# Altium PCB PCB_CAMBIEN_VER2.PcbDoc
Units mm, origin at the board's own origin, x right, y up, seen from the top; angles counter-clockwise.
Board outline 71.25 x 52.25 mm, 2 copper layers (Top Layer, Bottom Layer); 54 components, 40 nets, 197 pads, 46 vias.
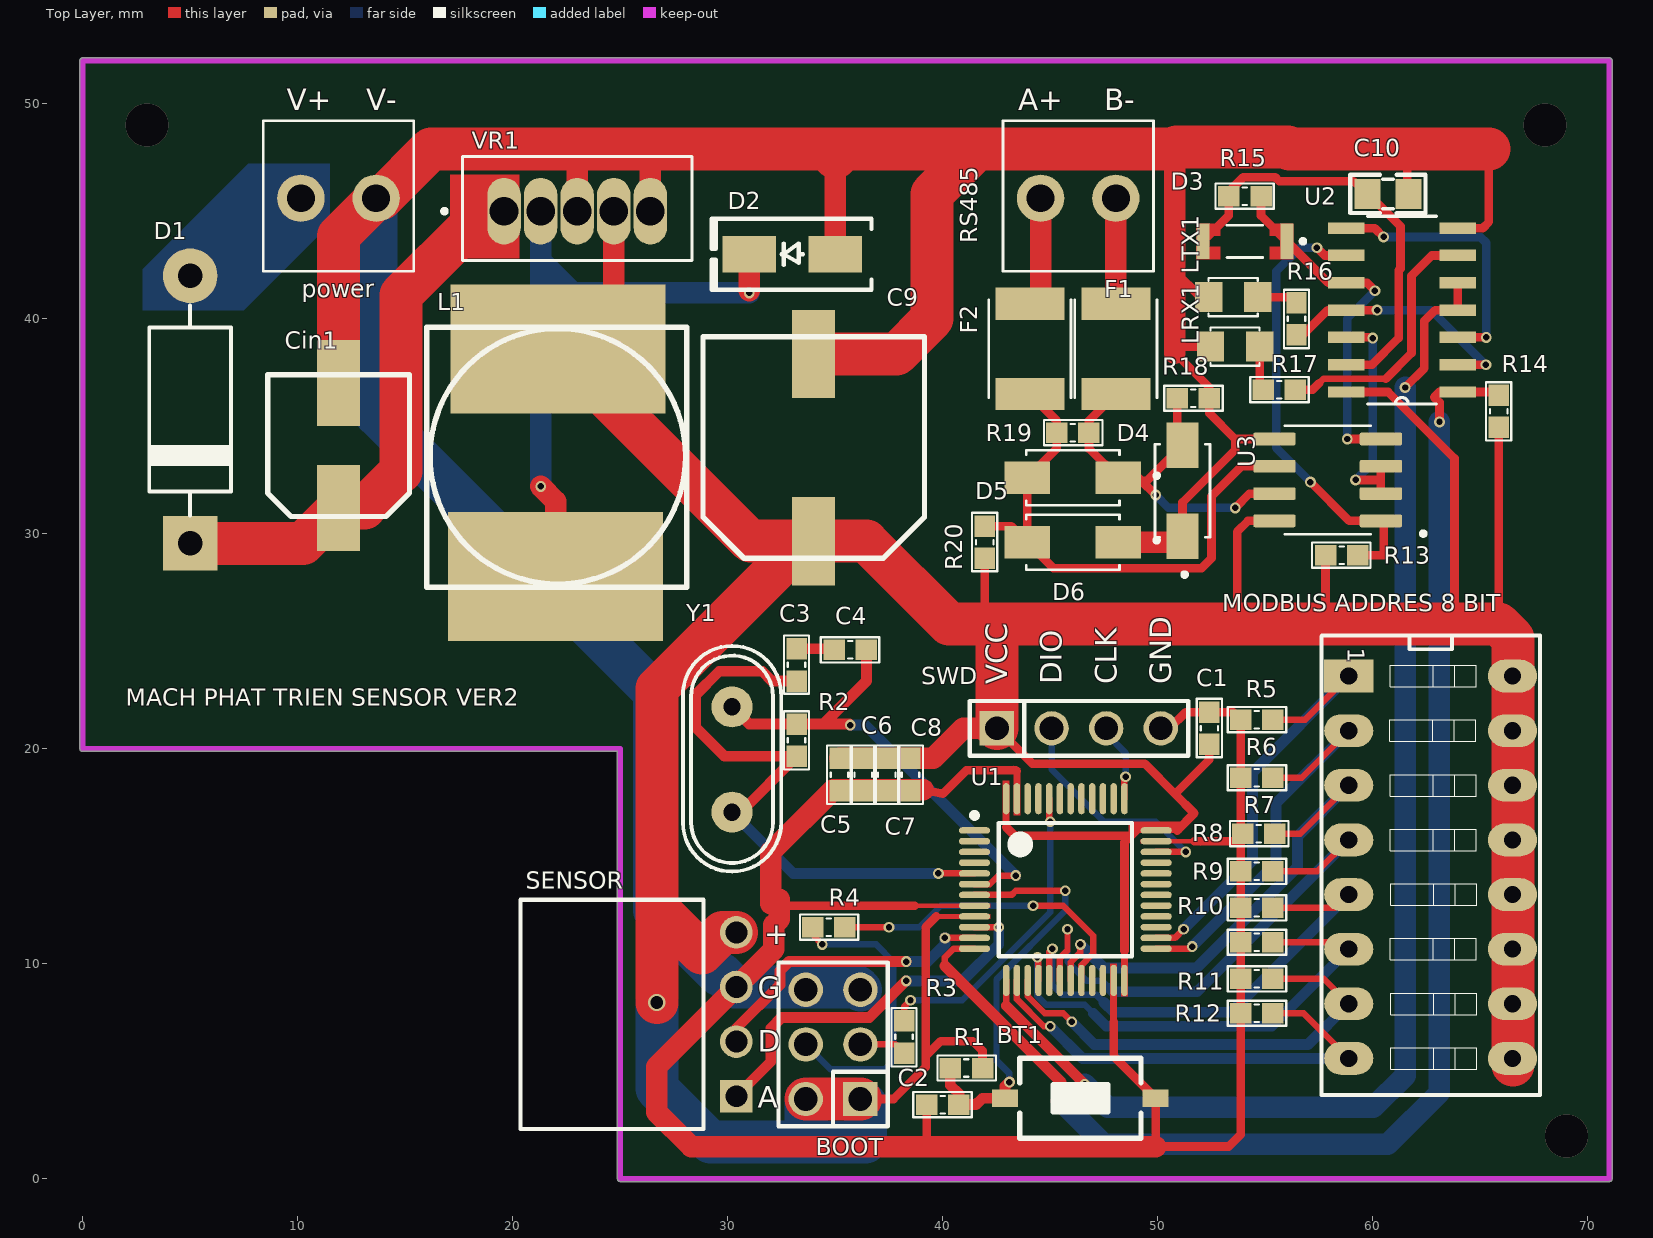
[diagram p0: Top Layer view]
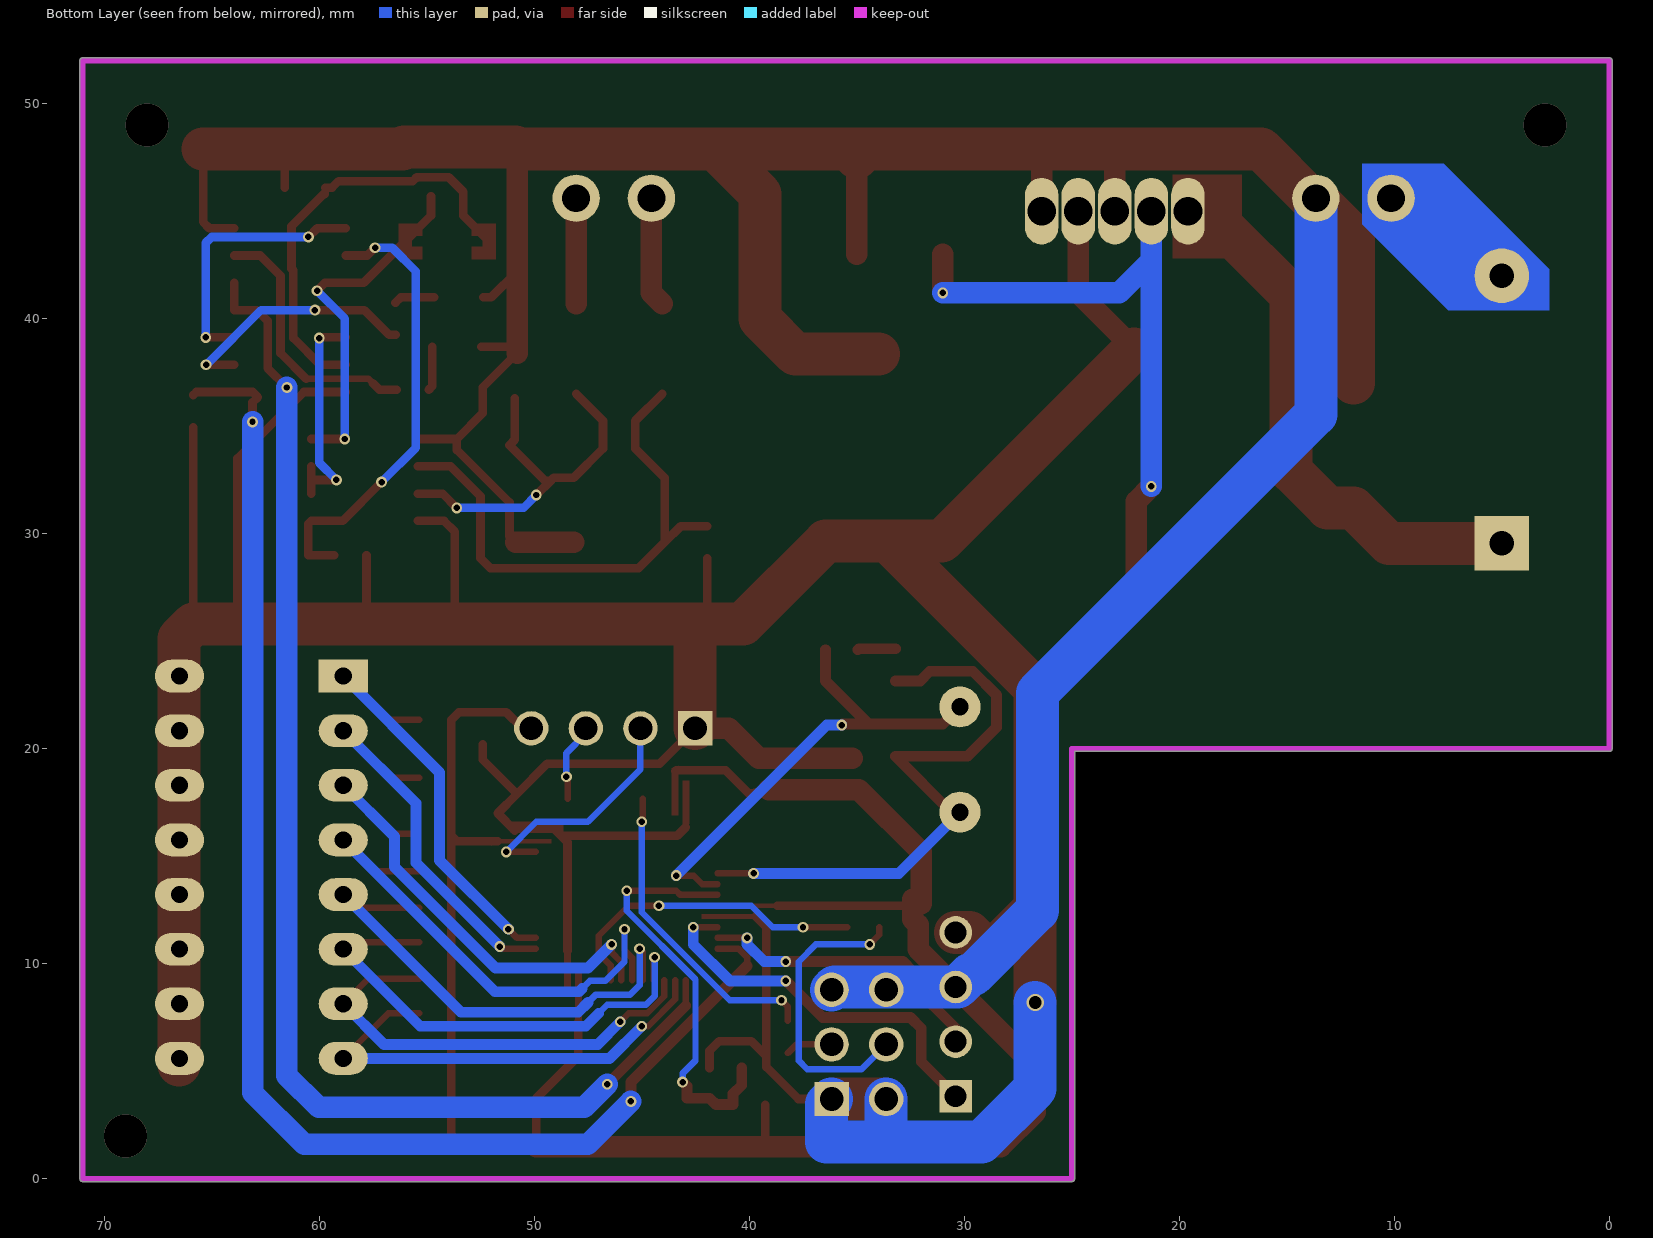
[diagram p1: Bottom Layer view, seen from below]
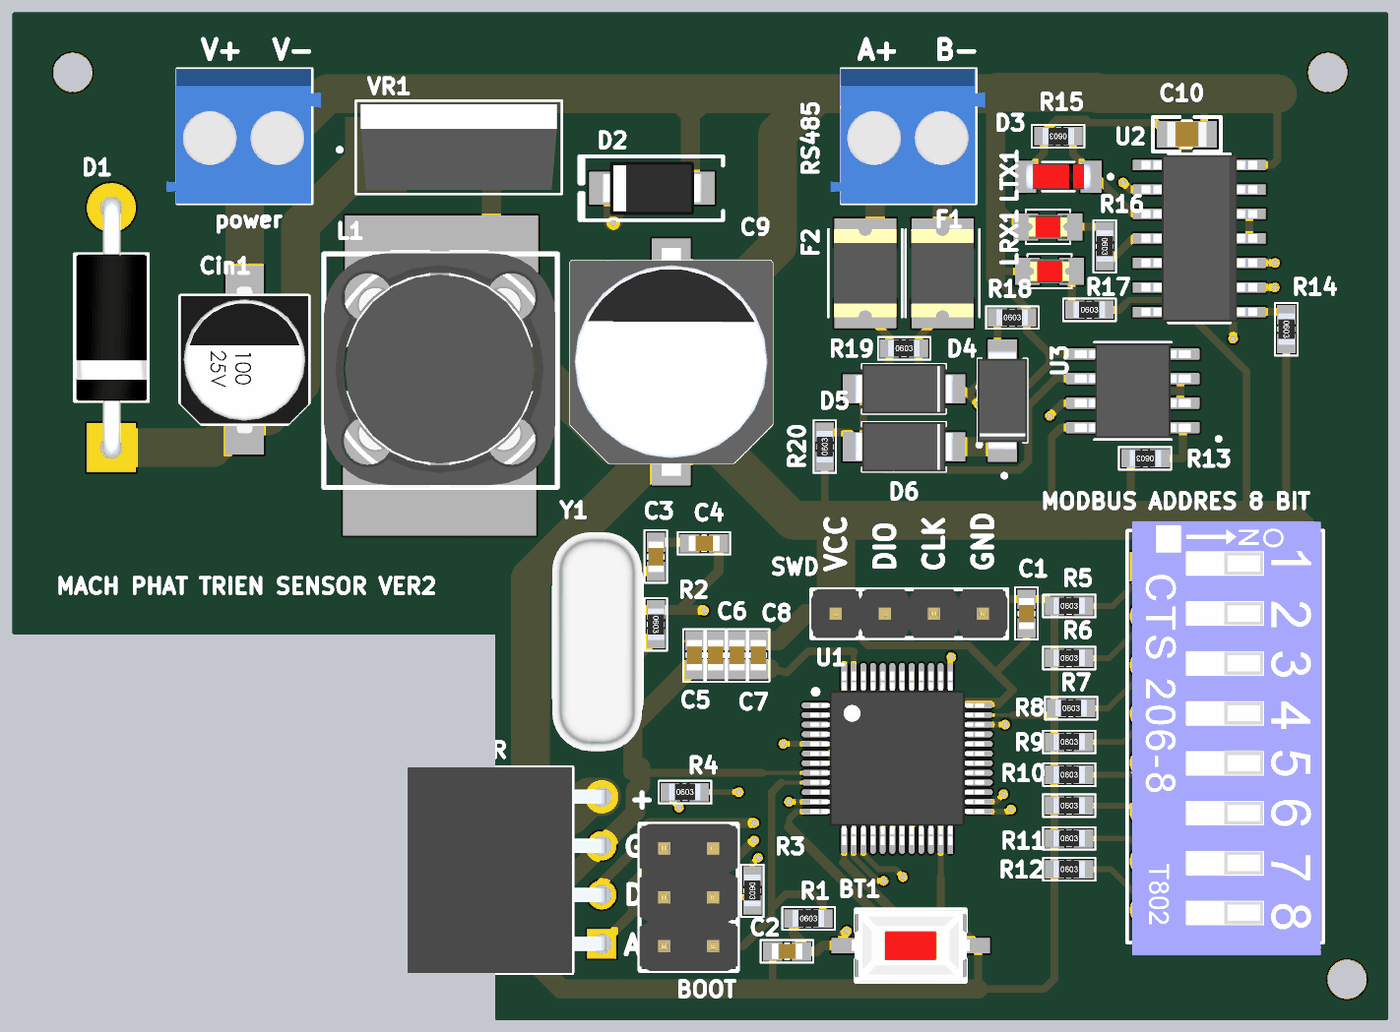
[diagram p2: 3D render of the assembled board from above, using the file's embedded part models]

## Layer stack, top to bottom
Top Solder: solder mask 0.0102, Solder Resist, Dk 3.5
Top Layer: signal copper 0.0356
Dielectric 1: dielectric 0.32, FR-4, Dk 4.8
Bottom Layer: signal copper 0.0356
Bottom Solder: solder mask 0.0102, Solder Resist, Dk 3.5

## Board outline
0,19.873 cw(c0,20) -0.127,20 -0.127,52 cw(c0,52) 0,52.127 71,52.127 cw(c71,52) 71.127,52 71.127,0 cw(c71,0) 71,-0.127 25,-0.127 cw(c25,0) 24.873,0 24.873,19.873

## Design rules (kind name [scope] priority, off if disabled: settings)
Clearance [All] p1: gap=0.15 ignorepadtopadclearanceinfootprint=FALSE
PolygonConnect [All] p1: connectstyle=Relief reliefconductorwidth=0.254 reliefentries=4 polygonreliefangle="90 Angle" airgapwidth=0.254
RoutingVias [InNetClass('power')] p1: holewidth=0.6 width=0.8 viastyle="Through Hole" minholewidth=0.6 minwidth=0.8 maxholewidth=0.6 maxwidth=0.8
RoutingVias RoutingVias_1 [InNetClass('All Nets')] p2: holewidth=0.3 width=0.5 viastyle="Through Hole" minholewidth=0.3 minwidth=0.5 maxholewidth=0.3 maxwidth=0.5
SolderMaskExpansion [All] p1: expansion=0.102
Width [InNetClass('power')] p1: maxlimit=2 minlimit=0.4 preferedwidth=1
Width Width_1 [InNetClass('All Nets')] p2: maxlimit=1 minlimit=0.3 preferedwidth=0.5
30 further rules are at their usual default settings.

## Classes and differential pairs
net class power: GND NetCin1_1 VCC3V
component class U_rs485: C10 D3 D4 D5 D6 F1 F2 LRX1 LTX1 R13 R14 R15 R16 R17 R18 R19 R20 RS485 U2 U3
component class U_power3v3: C9 Cin1 D1 D2 L1 power VR1
component class cambienmodbus: BOOT BT1 C1 C2 C3 C4 C5 C6 C7 C8 "MODBUS ADDRES 8 BIT" R1 R2 R3 R4 R5 R6 R7 R8 R9 R10 R11 R12 SENSOR SWD U1 Y1

## Components (designator, comment, footprint, x,y, rotation, side; value= is the part's Value field where it differs from the comment)
BOOT "JP 2x3 2.54" "JP 2x3 DT" 34.9,6.25 r90 top (schematic designator JP3)
BT1 "Nut Nhan 2 Chan SMD 3x6x2.5" "Nut Nhan 2 Chan SMD 3x6x2.5" 46.4,3.75 r180 top
C1 "104" "tu 0603" 52.4,20.95 r90 top
C2 "105" "tu 0603" 40,3.45 r180 top
C3 "22pF" "tu 0603" 33.2,23.9 r90 top
C4 "22pF" "tu 0603" 35.7,24.6 r180 top
C5 "104" "tu 0603" 35.2,18.8 r270 top
C6 "104" "tu 0603" 37.4,18.8 r270 top
C7 "104" "tu 0603" 36.3,18.8 r270 top
C8 "104" "tu 0603" 38.5,18.8 r270 top
C9 "1000uF" "tu nhom 10 (G)" 34,34 r90 top
C10 "33pF" "tu 0805" 60.7,45.8 r0 top
Cin1 "100uF" "tu nhom 6.3 (d)" 11.9,34.1 r90 top
D1 "Diode" DIO-3A 5,28.919 r90 top value=1N5007
D2 "SS34" "DIODE SMA" 33,43 r180 top
D3 "LL4148" DIO_LL4148 54.05,43.6 r180 top
D4 "SMAJ45A" DIOM4325X250N 51.15,32 r90 top
D5 "SMAJ45A" DIOM4325X250N 46.05,32.6 r180 top
D6 "SMAJ45A" DIOM4325X250N 46.05,29.6 r180 top
F1 "MF-MSMF020-2" FUSER_MF-MSMF020-2 48.05,38.6 r90 top
F2 "MF-MSMF020-2" FUSER_MF-MSMF020-2 44.05,38.6 r90 top
L1 "3A SMD" "Cuon Cam 12x12x10" 28.1,39.6 r180 top
LRX1 "LED 0805" LED-0805-Red 54.736,38.7 r180 top
LTX1 "LED 0805" LED-0805-Red 54.65,41 r180 top
"MODBUS ADDRES 8 BIT" "=partNo" SW-DIP8 58.88,23.38 r270 top (schematic designator S1)
power "KF2" KF2-3.5 11.9,45.6 r180 top (schematic designator J1)
R1 "10k" "tro smd 0603" 41.1,5.15 r0 top
R2 "1M" "tro smd 0603" 33.2,20.4 r270 top
R3 "100k" "tro smd 0603" 38.2,6.6 r270 top
R4 "100k" "tro smd 0603" 34.7,11.7 r0 top
R5 "10k" "tro smd 0603" 54.6,21.35 r0 top
R6 "10k" "tro smd 0603" 54.6,18.65 r0 top
R7 "10k" "tro smd 0603" 54.7,16.05 r0 top
R8 "10k" "tro smd 0603" 54.6,14.3 r0 top
R9 "10k" "tro smd 0603" 54.6,12.6 r0 top
R10 "10k" "tro smd 0603" 54.6,11 r0 top
R11 "10k" "tro smd 0603" 54.6,9.3 r0 top
R12 "10k" "tro smd 0603" 54.6,7.7 r0 top
R13 "4.7k" "tro smd 0603" 58.55,29 r180 top
R14 "4.7k" "tro smd 0603" 65.85,35.7 r270 top
R15 "51k" "tro smd 0603" 54.05,45.7 r180 top
R16 "2.2k" "tro smd 0603" 56.45,40 r270 top
R17 "2.2k" "tro smd 0603" 55.65,36.7 r0 top
R18 "4.7k" "tro smd 0603" 51.65,36.3 r0 top
R19 "150R" "tro smd 0603" 46.05,34.7 r0 top
R20 "4.7k" "tro smd 0603" 41.95,29.6 r90 top
RS485 "KF2" KF2-3.5 46.3,45.6 r180 top (schematic designator J2)
SENSOR "Sensor" "JP 1x4 CC" 30.4,7.65 r90 top (schematic designator JP1)
SWD "SWD" "JP 1x4 DT" 42.52,20.95 r0 top (schematic designator JP2)
U1 "STM32F103xx_LQFP48" STM32_LQPF48 45.7,13.45 r0 top
U2 "74HC04D" SOIC127P600X175-14N 61.35,40.4 r180 top
U3 "MAX485ESA+T" SOIC127P600X175-8N 57.9,32.5 r180 top
VR1 "LM2576T-ADJ/NOPB" TO170P1067X483X1651-5 23,45 r0 top
Y1 "16Mhz" "Thach Anh 2 chan cam" 30.2,19.5 r270 top value=4Mhz

## Footprints (in the part's own frame and the unit in brackets; to place one, negate y for a bottom-side part, rotate by r counter-clockwise, add the part's x,y. Pads: shape width x height; smd on the part's side, far side on the other; paste and mask are expansions set on the pad)
"Cuon Cam 12x12x10" [mm] "Cuon Cam 12x12x10"
  rect 10x6 smd: 1(6.1,11.6) 2(6,1)
  silkscreen extent 0,0 12.1,12.1, body extent 0.1,-0.2 12.1,12.14, height 7.51
DIO-3A [mil] "Diode 3A"
  round 100 hole 45: 1(515,0)
  rect 100x100 hole 45: 2(25,0)
  silkscreen extent 76,-75 461,75, body extent 4,-72 536,70, height 142
DIO_LL4148 [mm]
  rect 0.6x1.65 smd: A(1.95,0) C(-1.95,0)
  Top Layer region: -1.15,0.25 -1.65,0.25 -1.65,-0.25 -1.15,-0.25 -1.15,-0.825 -2.24,-0.825 -2.24,0.825 -1.15,0.825
  Top Layer region: 2.25,-0.825 1.15,-0.825 1.15,-0.25 1.65,-0.25 1.65,0.25 1.15,0.25 1.15,0.825 2.25,0.825
  silkscreen extent -2.8,-0.75 0.83,0.75, body extent -1.73,-0.75 1.73,0.75, height 1.5
"DIODE SMA" [mm] "SMA"
  rect 2.5x1.7 smd: 1(-2,0) 2(2,0)
  silkscreen extent -3.68,-1.65 3.75,1.65, body extent -2.6,-1.37 2.6,1.37, height 2.4
DIOM4325X250N [mm]
  rect 2.12x1.5 smd: A(2.115,0) C(-2.115,0)
  silkscreen extent -4,-1.28 2.16,1.28, body extent -2.57,-1.28 2.57,1.28, height 2.5
FUSER_MF-MSMF020-2 [mm]
  rect 1.5x3.2 smd: 1(-2.1,0) 2(2.1,0)
  silkscreen extent -2.27,-1.91 2.27,1.91, body extent -2.27,-1.62 2.27,1.62, height 0.85
"JP 1x4 CC" [mm]
  rect 1.52x1.52 hole 1.02: 1(-3.81,0)
  round 1.52 hole 1.02: 2(-1.27,0) 3(1.27,0) 4(3.81,0)
  silkscreen extent -5.33,1.52 5.33,10.03, body extent -5.33,-0.25 5.33,10.05, height 2.51
"JP 1x4 DT" [mm] "4 pins, 1 row, straight, gold plating"
  rect 1.6x1.6 hole 1.1: 1(0,0)
  round 1.6 hole 1.1: 2(2.54,0) 3(5.08,0) 4(7.62,0)
  silkscreen extent -1.27,-1.27 8.89,1.27, body extent -1.27,-1.27 8.89,1.27, height 8.54
"JP 2x3 DT" [mm]
  rect 1.6x1.6 hole 1.1: 1(-2.54,-1.27)
  round 1.6 hole 1.1: 2(0,-1.27) 3(2.54,-1.27) 4(2.54,1.27) 5(0,1.27) 6(-2.54,1.27)
  silkscreen extent -3.81,-2.54 3.81,2.54, body extent -3.81,-2.54 3.81,2.54, height 8.55
KF2-3.5 [mm] "3,50mm - modular - blue - Horizontal wire entry - Pressure clamp - 8,4mm height - 02p"
  round 2.2 hole 1.3: 1(-1.75,0) 2(1.75,0)
  silkscreen extent -3.5,-3.6 3.5,3.4, body extent -3.95,-3.6 4.05,3.4, height 8.41
LED-0805-Red [mil]
  rect 50x55 smd: 1(0,0) 2(90,0)
  silkscreen extent 0,-35 90,35, body extent 5,-25 85,25, height 43
"Nut Nhan 2 Chan SMD 3x6x2.5" [mm] "Switch SMD type"
  rect 1.2x0.8 smd: 1(-3.5,0) 2(3.5,0)
  silkscreen extent -2.82,-1.85 2.82,1.85, body extent -3.05,-1.85 3.05,1.85, height 2.5
SOIC127P600X175-8N [mm]
  rrect25% 1.97x0.59 smd: 1(-2.475,1.905) 2(-2.475,0.635) 3(-2.475,-0.635) 4(-2.475,-1.905) 5(2.475,-1.905) 6(2.475,-0.635) 7(2.475,0.635) 8(2.475,1.905)
  silkscreen extent -4.54,-2.52 2,2.59, body extent -3,-2.45 3,2.45, height 1.75
SOIC127P600X175-14N [mil]
  rect 67x21 smd: 1(-102,150) 2(-102,100) 3(-102,50) 4(-102,0) 5(-102,-50) 6(-102,-100) 7(-102,-150) 8(102,-150) 9(102,-100) 10(102,-50) 11(102,0) 12(102,50) 13(102,100) 14(102,150)
  silkscreen extent -63,-172 63,172, body extent -118,-170 118,170, height 69
STM32_LQPF48 [mm]
  oval 1.45x0.3 smd: 1(-4.225,2.75) 2(-4.225,2.25) 3(-4.225,1.75) 4(-4.225,1.25) 5(-4.225,0.75) 6(-4.225,0.25) 7(-4.225,-0.25) 8(-4.225,-0.75) 9(-4.225,-1.25) 10(-4.225,-1.75) 11(-4.225,-2.25) 12(-4.225,-2.75) 25(4.225,-2.75) 26(4.225,-2.25) 27(4.225,-1.75) 28(4.225,-1.25) 29(4.225,-0.75) 30(4.225,-0.25) 31(4.225,0.25) 32(4.225,0.75) 33(4.225,1.25) 34(4.225,1.75) 35(4.225,2.25) 36(4.225,2.75)
  oval 0.3x1.45 smd: 13(-2.75,-4.225) 14(-2.25,-4.225) 15(-1.75,-4.225) 16(-1.25,-4.225) 17(-0.75,-4.225) 18(-0.25,-4.225) 19(0.25,-4.225) 20(0.75,-4.225) 21(1.25,-4.225) 22(1.75,-4.225) 23(2.25,-4.225) 24(2.75,-4.225) 37(2.75,4.225) 38(2.25,4.225) 39(1.75,4.225) 40(1.25,4.225) 41(0.75,4.225) 42(0.25,4.225) 43(-0.25,4.225) 44(-0.75,4.225) 45(-1.25,4.225) 46(-1.75,4.225) 47(-2.25,4.225) 48(-2.75,4.225)
  silkscreen extent -4.35,-3.1 3.1,3.57, body extent -4.5,-4.5 4.5,4.5, height 1.6
SW-DIP8 [mil] "16 PIN, W 300mil, Pin to pin 100mil For Switch"
  rect 60x90 hole 31.5: 1(0,0)
  oval 60x90 hole 31.5: 2(100,0) 3(200,0) 4(300,0) 5(400,0) 6(500,0) 7(600,0) 8(700,0) 9(700,300) 10(600,300) 11(500,300) 12(400,300) 13(300,300) 14(200,300) 15(100,300) 16(0,300)
  silkscreen extent -74,-50 767,350, body extent -93,-40 793,345, height 325
"Thach Anh 2 chan cam" [mm]
  round 1.905 hole 0.8: 1(-2.45,0) 2(2.45,0)
  silkscreen extent -5.28,-2.29 5.21,2.29, body extent -5.68,-2.36 5.68,2.29, height 3.5
TO170P1067X483X1651-5 [mm]
  oval 1.55x3.1 hole 1.34: 1(-3.4,0) 2(-1.7,0) 3(0,0) 4(1.7,0) 5(3.4,0)
  silkscreen extent -6.27,-2.29 5.34,2.54, body extent -5.08,-2.09 5.08,2.35, height 16.84
"tro smd 0603" [mm] "Chip Capacitor, 2-Leads, Body 1,60x0,80mm, IPC Medium Density"
  rect 1x0.95 smd mask+0.076: 1(-0.75,0) 2(0.75,0)
  silkscreen extent -1.35,-0.58 1.37,0.58, body extent -0.82,-0.42 0.82,0.43, height 0.44
"tu 0603" [mm] "Chip Capacitor, 2-Leads, Body 1,60x0,80mm, IPC Medium Density"
  rect 1x0.95 smd mask+0.076: 1(-0.75,0) 2(0.75,0)
  silkscreen extent -1.35,-0.58 1.37,0.58, body extent -0.8,-0.4 0.8,0.4, height 0.9
"tu 0805" [mm] "Compoment SMD 80x50mil"
  rect 1.2x1.4 smd: 1(-0.946,-0.003) 2(0.954,-0.003)
  silkscreen extent -1.75,-0.89 1.75,0.89, body extent -1.01,-0.64 1.01,0.63, height 0.61
"tu nhom 6.3 (d)" [mm]
  rect 4x2 smd: 1(-2.9,0) 2(2.9,0)
  silkscreen extent -3.3,-3.3 3.3,3.3, body extent -3.8,-3.3 3.8,3.3, height 8
"tu nhom 10 (G)" [mm]
  rect 4.1x2 smd: 1(-4.35,0) 2(4.35,0)
  silkscreen extent -5.15,-5.15 5.15,5.15, body extent -5.9,-5.25 5.9,5.25, height 10.5

## Part data
BOOT: library part "JP 2x3 2.54 Duc Thang", "C?m", Chung_Loai=C?m, Don_Vi=Con, Ma_Hang=MH002686, Ten_Linh_Kien="Jump Ðôi Ð?c 2.54MM 2x40P Th?ng 11MM"
C1 C5 C6 C7 C8: library part "Tu 0603 104 50V 10%", "Dán", Chung_Loai=Dán, Don_Vi=Con, Ma_Hang=MH004568, So_Chan=2, Ten_Linh_Kien="T? 0603 104-100nF 10% 50V"
C2: library part "Tu 0603 105 16V 20%", "Dán", Chung_Loai=Dán, Don_Vi=Con, Ma_Hang=MH004574, So_Chan=2, Ten_Linh_Kien="T? 0603 105-1uF 20% 16V"
C3 C4: library part "Tu 0603 22pF 50V 10%", "Dán", Chung_Loai=Dán, Don_Vi=Con, Ma_Hang=MH004570, So_Chan=2, Ten_Linh_Kien="T? 0603 22pF 50V 10%"
C9: library part "Tu Nhom 1000uF 10V", "Dán", Chung_Loai=Dán, Don_Vi=Con, Ma_Hang=MH007515, So_Chan=2, Ten_Linh_Kien="T? Nhôm 1000uF 10V"
C10: library part "Tu 0805 33pF 50V 10%", "Dán", Chung_Loai=Dán, Don_Vi=Con, Ma_Hang=MH004563, So_Chan=2, Ten_Linh_Kien="T? 0805 33p 10% 50V"
Cin1: library part "Tu Nhom 100uF 16V", "Dán", Chung_Loai=Dán, Don_Vi=Con, Ma_Hang=MH002219, So_Chan=2, Ten_Linh_Kien="T? Nhôm 100uF 16V 6.3x5.4MM"
D1: "Default Diode", Code - JEDEC=DO-214-AB, Published=8-Jun-2000, Publisher="Altium Limited", Revision="July-2002: Re-released for DXP Platform."
D2: library part "Diode SS34 ( 1N5822 )", "Dán", Chung_Loai=Dán, Don_Vi=Con, Ma_Hang=MH002104, Ten_Linh_Kien="Diode SS34 3A 40V SMA ( 1N5822 SS34A)"
D3: "Diode Small Signal Switching 100V 0.15A Automotive 2-Pin Mini-MELF T/R", Package="MINIMELF-2 Diotec", Availability="In Stock", Check_prices=https://www.snapeda.com/parts/LL4148/Diotec/view-part/?ref=eda, MF="Diotec Semiconductor", MP=LL4148, Price=None, Purchase-URL=https://pricing.snapeda.com/search/part/LL4148/?ref=eda, SnapEDA_Link=https://www.snapeda.com/parts/LL4148/Diotec/view-part/?ref=snap
D4 D5 D6: "72.7V Clamp 5.5A Ipp Tvs Diode Surface Mount DO-214AC (SMA)", Package=DO-214, Availability=Unavailable, Check_prices=https://www.snapeda.com/parts/SMAJ45A/Littelfuse/view-part/?ref=eda, MF=Littelfuse, MP=SMAJ45A, Price=None, SnapEDA_Link=https://www.snapeda.com/parts/SMAJ45A/Littelfuse/view-part/?ref=snap
F1 F2: "Polymeric PTC Resettable Fuse 30V 200 mA Ih Surface Mount 1812 (4532 Metric), Concave", Package="1812 Bourns", Availability="In Stock", Check_prices=https://www.snapeda.com/parts/MF-MSMF020-2/Bourns/view-part/?ref=eda, MF=Bourns, MP=MF-MSMF020-2, Price=None, Purchase-URL=https://pricing.snapeda.com/search/part/MF-MSMF020-2/?ref=eda, SnapEDA_Link=https://www.snapeda.com/parts/MF-MSMF020-2/Bourns/view-part/?ref=snap
L1: library part "CUON CAM 100uH SMD", "Dán", Chung_Loai=Dán, Don_Vi=Con, Ten_Linh_Kien="Cu?n C?m 100uH 7x7x4MM CD74"
LRX1 LTX1: library part "LED 0805 Do", "Dán", Chung_Loai=Dán, Don_Vi=Con, Ma_Hang=MH000897, Ten_Linh_Kien="LED 0805 Màu Ð? (Red)"
"MODBUS ADDRES 8 BIT": library part SWDIP8, "WS-DITV 2.54 mm small compact THT flat actuator with top tape", Manufacturer="Wurth Elektronik", Part No.=418127160908, ComponentLink1 Description=Manufacturer, ComponentLink1URL=http://www.we-online.com, ComponentLink2 Description=Datasheet, ComponentLink2URL=http://katalog.we-online.de/em/datasheet/4181271609xx.pdf, Created by="Baojun Chen", Created Date=Dec.2015, Pole=08
power RS485: Manufacturer="Würth Elektronik eiSos GmbH", partNo=691103110002, ComponentLink1 Description=Manufacturer, ComponentLink1URL=http://www.we-online.com, ComponentLink2 Description=Datasheet, ComponentLink2URL=http://katalog.we-online.de/em/datasheet/6911031100xx.pdf, Created by="Karrer Zheng", Created Date="29 October 2013", NoPins=2
R1 R5 R6 R7 R8 R9 R10 R11 R12: library part "Tro 0603 5% 10k", "Dán", Chung_Loai=Dán, Don_Vi=Con, Ma_Hang=MH006316, So_Chan=2, Ten_Linh_Kien="Tr? 0603 5% 10k"
R2: library part "Tro 0603 5% 1M", "Dán", Chung_Loai=Dán, Don_Vi=Con, Ma_Hang=MH006909, So_Chan=2, Ten_Linh_Kien="Tr? 0603 5% 1M"
R3 R4: library part "Tro 0603 5% 100k", "Dán", Chung_Loai=Dán, Don_Vi=Con, Ma_Hang=MH006314, So_Chan=2, Ten_Linh_Kien="Tr? 0603 5% 100k"
R13 R14 R18 R20: library part "Tro 0603 5% 4.7k", "Dán", Chung_Loai=Dán, Don_Vi=Con, Ma_Hang=MH006327, So_Chan=2, Ten_Linh_Kien="Tr? 0603 5% 4.7k"
R15: library part "Tro 0603 5% 51k", "Dán", Chung_Loai=Dán, Don_Vi=Con, Ma_Hang=MH007666, So_Chan=2, Ten_Linh_Kien="Tr? 0603 5% 51k"
R16 R17: library part "Tro 0603 5% 2.2k", "Dán", Chung_Loai=Dán, Don_Vi=Con, Ma_Hang=MH006321, So_Chan=2, Ten_Linh_Kien="Tr? 0603 5% 2.2k"
R19: library part "Tro 0603 5% 150R", "Dán", Chung_Loai=Dán, Don_Vi=Con, Ma_Hang=MH006318, So_Chan=2, Ten_Linh_Kien="Tr? 0603 5% 150R"
SENSOR: library part "JP 1x4 2.54 Cai Cong", "C?m", Chung_Loai=C?m, Don_Vi=Con, Ma_Hang=MH001265, Ten_Linh_Kien="Jump Ðon Cái 2.54MM 1x40P Cong"
SWD: library part "JP 1x4 2.54 Duc Thang", "C?m", Chung_Loai=C?m, Don_Vi=Con, Ma_Hang=MH000903, Ten_Linh_Kien="Jump Ðon Ð?c 2.54MM 1x40P Th?ng 11MM"
U2: "Inverter IC 6 Channel 14-SOIC", Package="SOIC-14 NXP Semiconductors", Availability=Unavailable, MF=Toshiba, MP=74HC04D, Price=None, SnapEDA_Link=https://www.snapeda.com/parts/74HC04D/Toshiba%20Semiconductor%20and%20Storage/view-part/1040011/?ref=snap
U3: "1/1 Transceiver Half RS422, RS485 8-SOIC", Package="SOIC-8 Maxim", Availability="In Stock", Check_prices=https://www.snapeda.com/parts/MAX485ESA/Maxim+Integrated/view-part/?ref=eda, MF="Maxim Integrated", MP=MAX485ESA, Price=None, Purchase-URL=https://pricing.snapeda.com/search/part/MAX485ESA/?ref=eda, SnapEDA_Link=https://www.snapeda.com/parts/MAX485ESA/Maxim+Integrated/view-part/?ref=snap
VR1: "SIMPLE SWITCHER® 40V, 3A Low Component Count Step-Down Regulator", Package=None, Availability=Unavailable, MP=LM2576T-ADJ/NOPB, Price=None
Y1: library part "Thach Anh 2 chan Cam", "Crystal For all Crystal 2pin."
BT1: Ma_Hang=MH001036, Ten="Nút Nh?n 2 Chân 3x6x2.5MM SMD"
U1: ComponentLink1Description="Manufacturer Link", ComponentLink1URL=www.st.com/stm32, ComponentLink2Description=Datasheet, ComponentLink2URL=http://www.st.com/stonline/products/literature/ds/13587.pdf, DatasheetVersion="rev6, Mar-2008", PackageDescription="48-Pin Low-Profile Quad Flat Pack, 7 x 7 mm Body, 0.5 mm Pitch (LQFP48)", PackageReference=LQFP48, PackageVersion=Mar-2008, Published=30-May-2008, Publisher="Altium Limited"

## Via types
v1: diameter 0.5, hole 0.3, Top Layer to Bottom Layer, 42 vias
v2: diameter 2, hole 2, Top Layer to Bottom Layer, 3 vias
v3: diameter 0.8, hole 0.6, Top Layer to Bottom Layer, 1 vias

## Nets (pads, with @x,y where several pads share a name; then routed paths per layer and width w, separated by ;. In a path a pad name is that pad's centre, name@x,y a point inside that pad or via, vN(x,y) a via of type N, cw(c..) or ccw(c..) an arc to the next point about the centre after c; other vN are vias at no path point)
A+: F2.2 RS485.2 | length 5.1
  Top Layer w1: F2.2 44.55,41.2 RS485.2
AN: SENSOR.1 U1.10 | length 18
  Top Layer w0.3: U1.10 v1(42.6,11.7)
  Top Layer w0.5: SENSOR.1 32,5.44 32,7 32.5,7.5 36.577,7.5 38.277,9.2 v1(38.3,9.2)
  Bottom Layer w0.5: v1(38.3,9.2) 40.9,9.2 42.6,10.9 v1(42.6,11.7)
B-: F1.2 RS485.1 | length 4.9
  Top Layer w1: F1.2 RS485.1
BIT0: "MODBUS ADDRES 8 BIT.8" R12.2 U1.14 | length 21.8
  Top Layer w0.3: U1.14 43.45,8.35 44.7,7.1 v1(45,7.1) ; R12.2 56.78,7.7 58.88,5.6
  Bottom Layer w0.5: v1(45,7.1) 46.5,5.6 58.88,5.6
BIT1: "MODBUS ADDRES 8 BIT.7" R11.2 U1.15 | length 21.4
  Top Layer w0.3: U1.15 43.95,8.486 44.736,7.7 45.6,7.7 v1(46,7.3) ; R11.2 57.72,9.3 58.88,8.14
  Bottom Layer w0.5: v1(46,7.3) 47.05,6.25 56.99,6.25 58.88,8.14
BIT2: "MODBUS ADDRES 8 BIT.6" R10.2 U1.16 | length 23.1
  Top Layer w0.3: v1(44.4,10.3) 44.45,10.25 U1.16 ; R10.2 58.56,11 58.88,10.68
  Bottom Layer w0.3: v1(44.4,10.3) 44.4,8.5 44.8,8.1 46.6,8.1 47,7.7
  Bottom Layer w0.5: 47,7.7 47.6,7.1 55.3,7.1 58.88,10.68
BIT3: "MODBUS ADDRES 8 BIT.5" R9.2 U1.17 | length 23.6
  Top Layer w0.3: U1.17 44.95,10.55 v1(45.1,10.7) ; R9.2 58.26,12.6 58.88,13.22
  Bottom Layer w0.3: v1(45.1,10.7) 45.1,9 45.55,8.55 47.15,8.55 47.5,8.2
  Bottom Layer w0.5: 47.5,8.2 47.95,7.75 53.41,7.75 58.88,13.22
BIT4: "MODBUS ADDRES 8 BIT.4" R8.2 U1.18 | length 24.7
  Top Layer w0.3: U1.18 45.45,10.272 45.8,10.622 v1(45.8,11.6) ; R8.2 57.42,14.3 58.88,15.76
  Bottom Layer w0.3: v1(45.8,11.6) 45.8,10.1 46.7,9.2 47.419,9.2 47.769,8.85
  Bottom Layer w0.5: 47.769,8.85 47.919,8.7 51.82,8.7 58.88,15.76
BIT5: "MODBUS ADDRES 8 BIT.3" R7.2 U1.19 | length 23.5
  Top Layer w0.3: U1.19 45.95,10.073 46.4,10.523 v1(46.4,10.9) ; R7.2 56.63,16.05 58.88,18.3
  Bottom Layer w0.5: v1(46.4,10.9) 47.5,9.8 51.8,9.8 56.5,14.5 56.5,15.92 58.88,18.3
BIT6: "MODBUS ADDRES 8 BIT.2" R6.2 U1.25 | length 19.2
  Top Layer w0.3: U1.25 51.5,10.7 v1(51.6,10.8) ; R6.2 56.69,18.65 58.88,20.84
  Bottom Layer w0.5: v1(51.6,10.8) 55.5,14.7 55.5,17.46 58.88,20.84
BIT7: "MODBUS ADDRES 8 BIT.1" R5.2 U1.26 | length 20.8
  Top Layer w0.3: U1.26 50.8,11.2 v1(51.2,11.6) ; R5.2 56.85,21.35 58.88,23.38
  Bottom Layer w0.5: v1(51.2,11.6) 54.4,14.8 54.4,18.9 58.88,23.38
BOOT0: R3.1 U1.44 | length 14.6
  Top Layer w0.3: R3.1 38.2,8 v1(38.5,8.3) ; U1.44 44.95,16.65 v1(45,16.6)
  Bottom Layer w0.3: v1(38.5,8.3) 40.9,8.3 45,12.4 v1(45,16.6)
BOOT1: R4.2 U1.20 | length 14.8
  Top Layer w0.3: R4.2 v1(37.5,11.7) ; v1(44.2,12.7) 45.6,12.7 47,11.3 47,10.486 46.45,9.936 U1.20
  Bottom Layer w0.3: v1(37.5,11.7) 38.9,11.7 39.9,12.7 v1(44.2,12.7)
DI: SENSOR.2 U1.11 | length 14
  Top Layer w0.3: v1(40.1,11.2) U1.11
  Top Layer w0.5: SENSOR.2 30.4,7 32.43,9.03 32.43,9.677 32.853,10.1 v1(38.3,10.1)
  Bottom Layer w0.5: v1(38.3,10.1) 39.3,10.1 40.1,10.9 v1(40.1,11.2)
GND: BOOT.3 BOOT.4 BT1.1 C1.2 C2.2 C5.2 C6.2 C7.2 C8.2 C9.2 C10.2 Cin1.2 D2.1 D4.C D6.C LRX1.2 LTX1.2 power.1 R5.1 R6.1 R7.1 R8.1 R9.1 R10.1 R11.1 R12.1 R18.2 SENSOR.3 SWD.4 U1.8 U1.23 U1.35 U1.47 U2.7 U3.5 VR1.3 VR1.5 | length 270.6
  Top Layer w0.4: 32.4,13 32.1,12.7 32.4,12.7 38.7,12.7 ; 39.1,18.1 40,17.9 41.1,19 43.4,19 43.45,18.95 ; C2.2 39.25,1.55 39.3,1.5 ; 47.95,7.3 47.95,5.7 BT1.1 49.9,1.5 53.3,1.5 53.85,2.05 53.85,3.35 53.85,5.95 53.85,8.55 53.85,11.15 53.85,13.55 R7.1@53.85,15.95 ; SWD.4 50.55,20.95 51.3,21.7 C1.2 53.5,21.7 R5.1 R6.1 R7.1@53.85,15.95 ; 50.8,38.4 52.4,36.8 R18.2 52.4,35.6 53.595,34.405 ; 50.8,39.1 51.2,38.7 LRX1.2 ; 50.8,42.2 52,41 LTX1.2 ; D4.C 51.15,31.45 53.595,33.895 53.595,34.405 ; 51.7,15.7 53.6,15.7 R7.1@53.85,15.95 ; U3.5 53.595,34.405 ; C10.2@61.604,46.097 61.604,47.9 ; U2.7 65.11,44.21 65.4,44.5 65.4,47.9
  Top Layer w1: VR1.3 23,47.5 23.4,47.9 ; VR1.5 26.4,47.8 26.5,47.9 ; 32,12.8 32,15.2 34.9,18.1 35.2,18.1 39.1,18.1 ; 32.4,13 32.4,12.7 32.4,12.065 32.15,11.815 32.15,10.67 SENSOR.3 26.7,5.22 26.7,3.1 28.3,1.5 39.3,1.5 49.9,1.5 ; D2.1 35,47.5 35,47.9 ; D6.C D4.C@50.865,29.6 ; 50.8,38.4 50.8,39.1 50.8,42.2 50.8,47.897
  Top Layer w2: Cin1.2 11.9,43.85 power.1 13.9,45.6 16.2,47.9 23.4,47.9 26.5,47.9 35,47.9 35.4,47.9 ; C9.2 37.85,38.35 39.5,40 39.5,45.8 41.6,47.9 ; 35,47.5 35.4,47.9 ; 65.4,47.9 61.604,47.9 59.603,47.9 59.6,47.897 56.124,47.897 56.046,47.975 50.878,47.975 50.8,47.897 48.903,47.897 48.9,47.9 41.6,47.9 ; 35.4,47.9 41.6,47.9
  Bottom Layer w2: power.1 13.65,35.55 26.6,22.6 26.6,12.488 29.588,9.5 29.73,9.5 30.31,8.92 SENSOR.3 36.04,8.92 BOOT.3
NetC3_2: C3.2 C4.2 | length 1.8
  Top Layer w0.5: C3.2 34.9,24.65 C4.2
NetC10_1: C10.1 D3.A R15.2 U2.13 | length 20.1
  Top Layer w0.4: D3.A 53.3,44.8 R15.2 53.3,45.9 53.975,46.575 55.466,46.575 55.641,46.4 59.097,46.4 59.4,46.097 C10.1@59.704,46.097 ; U2.13 59.96,37.86 61.2,39.1 61.2,42.249 61.285,42.334 61.285,44.3 59.754,45.831 C10.1
NetCin1_1: Cin1.1 D1.2 VR1.1 | length 24
  Top Layer w2: D1.2 10.254,29.554 Cin1.1 13.1,31.2 14.8,32.9 14.8,41.1 18.05,44.35
NetD1_1: D1.1 power.2
NetD2_2: D2.2 L1.1 VR1.2 | length 29.3
  Top Layer w1: v1(21.3,32.2) 22,31.5 L1.1 ; v1@31,41.3 D2.2
  Bottom Layer w1: v1(21.3,32.2) 21.3,42.7 ; VR1.2 21.3,42.7 ; v1(31,41.2) 22.8,41.2 21.3,42.7
NetD3_C: D3.C R15.1 U2.10 U3.4 | length 16.7
  Top Layer w0.4: R15.1 54.8,44.8 D3.C 57.93,41.67 U2.10 59.73,41.67 v1(60.1,41.3) ; v1(58.805,34.405) U3.4
  Bottom Layer w0.4: v1(58.805,34.405) 58.805,40.005 v1(60.1,41.3)
NetD4_A: D4.A D5.C F1.1 R18.1 R19.2 U3.7 | length 18
  Top Layer w0.4: F1.1 46.8,35.25 R19.2 46.8,33.965 D5.C 49.1,32.6 49.235,32.465 ; v1(49.9,31.8) 49.235,32.465 ; R18.1 50.9,34.365 D4.A 49.5,32.465 49.235,32.465 ; v1(53.6,31.2) 54.265,31.865 U3.7
  Bottom Layer w0.4: v1(49.9,31.8) 50.5,31.2 v1(53.6,31.2)
NetD5_A: D5.A D6.A F2.1 R19.1 R20.2 U3.6 | length 25.9
  Top Layer w0.4: R20.2 43.185,30.35 D6.A ; F2.1 45.3,35.25 R19.1 45.3,33.965 D5.A D6.A ; U3.6 53.894,33.135 52.5,31.741 52.5,28.859 52.041,28.4 45.135,28.4 D6.A
NetJP3_2: BOOT.2 R3.2 | length 2.2
  Top Layer w0.3: BOOT.2 37.8,6.25 R3.2
NetJP3_5: BOOT.5 R4.1 | length 13.9
  Top Layer w0.3: R4.1 33.95,11.35 v1(34.4,10.9)
  Bottom Layer w0.3: BOOT.5 34.78,5.1 37.3,5.1 37.7,5.5 37.7,10.1 36.9,10.9 v1(34.4,10.9)
NetLRX1_1: LRX1.1 R17.1 | length 2.1
  Top Layer w0.4: LRX1.1 54.736,36.864 R17.1
NetLTX1_1: LTX1.1 R16.1 | length 1.9
  Top Layer w0.4: LTX1.1 56.2,41 R16.1
NetR13_1: R13.1 U2.9 U3.1 | length 21.2
  Top Layer w0.4: v1(57.1,32.4) 58.905,30.595 U3.1 60.5,30.47 60.5,29 R13.1 ; v1(57.4,43.3) 57.76,42.94 U2.9
  Bottom Layer w0.4: v1(57.1,32.4) 55.5,34 55.5,42.2 56.6,43.3 v1(57.4,43.3)
NetR16_2: R16.2 U2.2 U2.11 | length 11.7
  Top Layer w0.4: R16.2 56.75,39.25 57.9,40.4 U2.11 v1(60.2,40.4) ; U2.2 v1(65.26,37.86)
  Bottom Layer w0.4: v1(60.2,40.4) 62.7,40.4 65.24,37.86 v1(65.26,37.86)
NetR17_2: R17.2 U2.6 | length 12.2
  Top Layer w0.3: 57.5,37 57.707,37.207 60.593,37.207 60.6,37.2
  Top Layer w0.4: R17.2 57.2,36.7 57.5,37 ; 60.6,37.2 61.8,38.4 61.8,42 62.74,42.94 U2.6
NetU2_3: U2.3 U2.8 | length 12.5
  Top Layer w0.4: U2.8 60.09,44.21 v1(60.5,43.8) ; U2.3 v1(65.27,39.13)
  Bottom Layer w0.4: v1(60.5,43.8) 65,43.8 65.27,43.53 v1(65.27,39.13)
NetU2_12: U2.12 U3.2 U3.3 | length 10.6
  Top Layer w0.4: U2.12 59.97,39.13 v1(60,39.1) ; v1(59.2,32.5) 60.375,32.5 ; U3.2 60.375,32.5 ; U3.3 60.375,32.5
  Bottom Layer w0.4: v1(59.2,32.5) 60,33.3 v1(60,39.1)
OSCIN: C3.1 R2.2 U1.5 Y1.2 | length 28.6
  Top Layer w0.3: v1(39.8,14.2) U1.5
  Top Layer w0.5: Y1.2 30.6,17.05 R2.2 29.85,19.65 28.5,21 28.5,22.5 29.6,23.6 31.6,23.6 32.05,23.15 C3.1
  Bottom Layer w0.5: Y1.2 33.05,14.2 v1(39.8,14.2)
OSCOUT: C4.1 R2.1 U1.6 Y1.1 | length 22.8
  Top Layer w0.3: U1.6 42.186,13.7 42.586,14.1 v1(43.4,14.1)
  Top Layer w0.5: Y1.1 31,21.15 R2.1 34.45,21.15 ; v1(35.7,21.1) 35.65,21.15 34.45,21.15 ; C4.1 36.45,23.15 34.45,21.15
  Bottom Layer w0.5: v1(35.7,21.1) 36.4,21.1 v1(43.4,14.1)
RESET: BT1.2 C2.1 R1.1 U1.7 | length 19.8
  Top Layer w0.3: U1.7 43.2,13.2 43.4,13.4 v1(45.7,13.4)
  Top Layer w0.5: R1.1 40.35,4.35 40.75,3.95 C2.1 41.55,3.45 41.85,3.75 BT1.2 42.9,4.3 v1(43.1,4.5)
  Bottom Layer w0.3: v1(43.1,4.5) 43.1,4.9 42.5,5.5 42.5,9.264 45.7,12.464 v1(45.7,13.4)
RX2: U1.13 U2.4 U2.5 | length 60.8
  Top Layer w0.3: 42.95,8.05 U1.13
  Top Layer w0.4: v1(61.5,36.8) 62.4,37.7 62.4,39.9 62.9,40.4 U2.4 U2.5
  Top Layer w0.5: 42.95,8.05 v1(46.6,4.4)
  Bottom Layer w1: v1(46.6,4.4) 47.678,3.322 60.022,3.322 61.5,4.8 v1(61.5,36.8)
SWDCLK: SWD.3 U1.37 | length 3.7
  Top Layer w0.3: U1.37 48.45,18.65 v1(48.5,18.7)
  Bottom Layer w0.3: SWD.3 47.6,20.7 48.5,19.8 v1(48.5,18.7)
SWDIO: SWD.2 U1.34 | length 11.1
  Top Layer w0.3: U1.34 v1(51.3,15.2)
  Bottom Layer w0.3: SWD.2 45.06,19.04 47.5,16.6 49.9,16.6 v1(51.3,15.2)
TX2: R14.1 U1.12 U2.1 | length 65.5
  Top Layer w0.3: 40.1,9.9 40.1,10.3 40.5,10.7 U1.12
  Top Layer w0.4: v1(63.1,35.2) 63.1,36.1 62.85,36.35 63.09,36.59 U2.1 65.71,36.59 R14.1
  Top Layer w0.5: 40.1,9.9 45.5,4.5 v1(45.5,3.6)
  Bottom Layer w1: v1(45.5,3.6) 47.5,1.6 60.7,1.6 63.1,4 v1(63.1,35.2)
VCC3V: "MODBUS ADDRES 8 BIT.9" "MODBUS ADDRES 8 BIT.10" "MODBUS ADDRES 8 BIT.11" "MODBUS ADDRES 8 BIT.12" "MODBUS ADDRES 8 BIT.13" "MODBUS ADDRES 8 BIT.14" "MODBUS ADDRES 8 BIT.15" "MODBUS ADDRES 8 BIT.16" BOOT.1 BOOT.6 C1.1 C5.1 C6.1 C7.1 C8.1 C9.1 L1.2 R1.2 R13.2 R14.2 R20.1 SENSOR.4 SWD.1 U1.9 U1.24 U1.36 U1.48 U2.14 U3.8 VR1.4 | length 218.1
  Top Layer w0.4: BOOT.1 37.71,3.71 39.2,5.2 39.2,11.7 39.7,12.2 ; 39.3,5.8 39.9,6.4 41.4,6.4 41.85,5.95 R1.2 ; R20.1 41.95,25.95 42.1,25.8 ; SWD.1 44.17,19.3 49.4,19.3 50.8,17.9 ; 42.95,16.35 43.35,15.95 48.75,15.95 ; 48.45,10.6 48.45,15.65 48.75,15.95 ; 49,16.2 48.75,15.95 ; 50.9,16.2 51.7,17 50.8,17.9 ; C1.1 52.4,19.5 50.8,17.9 ; 53.7,25.8 53.7,30.1 54.195,30.595 U3.8 ; 57.8,25.8 R13.2 ; U2.14 60.71,36.59 63.8,33.5 63.8,25.8 ; 65.85,25.8 R14.2
  Top Layer w1: L1.2 24.7,41.2 VR1.4 ; C5.1 C7.1 C6.1 C8.1 39.55,19.55 40.95,20.95 SWD.1
  Top Layer w2: L1.2 31.05,29.65 C9.1@33.55,29.65 ; v3(26.7,8.2) 26.7,12.6 ; SENSOR.4 29.76,11.46 28.8,10.5 26.7,12.6 ; BOOT.6 BOOT.1 ; SWD.1 42.52,25.38 42.1,25.8 ; 66.52,5.3 66.52,6.01 66.52,8.55 66.52,10.68 66.52,18.3 66.52,20.84 66.52,23.38 66.52,25.13 65.85,25.8 63.8,25.8 57.8,25.8 53.7,25.8 42.1,25.8 ; 26.7,12.6 26.7,22.8 C9.1@33.55,29.65 ; C9.1@33.55,29.65 C9.1 36.45,29.65 40.3,25.8 42.1,25.8
  Bottom Layer w2: v3(26.7,8.2) 26.7,4.2 29.2,1.7 33.3,1.7 ; BOOT.6 33.63,2.03 33.3,1.7 ; BOOT.1 36.4,3.48 36.4,1.7 33.3,1.7
pads on no net: U1.1 U1.2 U1.3 U1.4 U1.21 U1.22 U1.27 U1.28 U1.29 U1.30 U1.31 U1.32 U1.33 U1.38 U1.39 U1.40 U1.41 U1.42 U1.43 U1.45 U1.46
copper on no net:
  other v2: 69,2 3,49 68,49

## Keep-outs
Keep-Out Layer:
  lines w0.254: 0,20 0,52 71,52 71,0 25,0 25,20 0,20

## Other copper
Top Layer:
  region net VCC3V: 48.6,8.5 48.3,8.5 48.3,10.7 48.4,10.8 48.6,10.8
  region net VCC3V: 42.8,18.5 43.1,18.5 43.1,16.2 42.8,16.5
  region net VCC3V: 42.2,12.3 39.5,12.3 39.7,12.1 42.2,12.1
  region net VCC3V: 51.1,16.1 48.65,16.1 48.65,16.6 51.15,16.6
  region net GND: 47.8,10 48.1,10 48.1,7.1 47.8,7.1
  region net GND: 49.2,15.8 52,15.8 52,15.5 51.9,15.6 49.2,15.6
  region net GND: 43.3,16.9 43.6,16.9 43.6,19.1 43.4,19.1 43.3,19.2
  region net GND: 42.2,12.8 42.2,12.6 38.8,12.6 38.7,12.7 38.8,12.8
  region net NetCin1_1: 20.3,46.7 20.3,42.8 17.1,42.8 17.1,46.7
Bottom Layer:
  region net NetD1_1: 11.5,47.2 11.5,44.4 7.5,40.4 2.8,40.4 2.8,42.3 7.7,47.2

## Silkscreen, mask and mechanical layers (free items; w line width, h text height)
Top Overlay:
  text "V+" at 9.5,49.7 h1
  text "V-" at 13.2,49.7 h1
  text "A+" at 43.5,49.7 h1
  text "B-" at 47.5,49.7 h1
  text "VCC" at 43,23 h1 r90
  text "DIO" at 45.54,23 h1 r90
  text "CLK" at 48.08,23 h1 r90
  text "GND" at 50.62,23 h1 r90
  text "MACH PHAT TRIEN SENSOR VER2" at 2,22 h0.8
  text "+" at 31.7,10.9 h1
  text "G" at 31.4,8.4 h1
  text "D" at 31.4,5.9 h1
  text "A" at 31.4,3.3 h1

## Text inside footprints (layer, text, board x,y; h text height)
"MODBUS ADDRES 8 BIT": Top Overlay "1" at 58.829,24.701 h0.8 r270